# Altium PCB PCB1.PcbDoc
Units mm, origin at the board's own origin, x right, y up, seen from the top; angles counter-clockwise.
Board outline 30 x 15 mm, 2 copper layers (Top Layer, Bottom Layer); 19 components, 17 nets, 63 pads, 8 vias.
Unrouted connection lines stored in the file: 4.
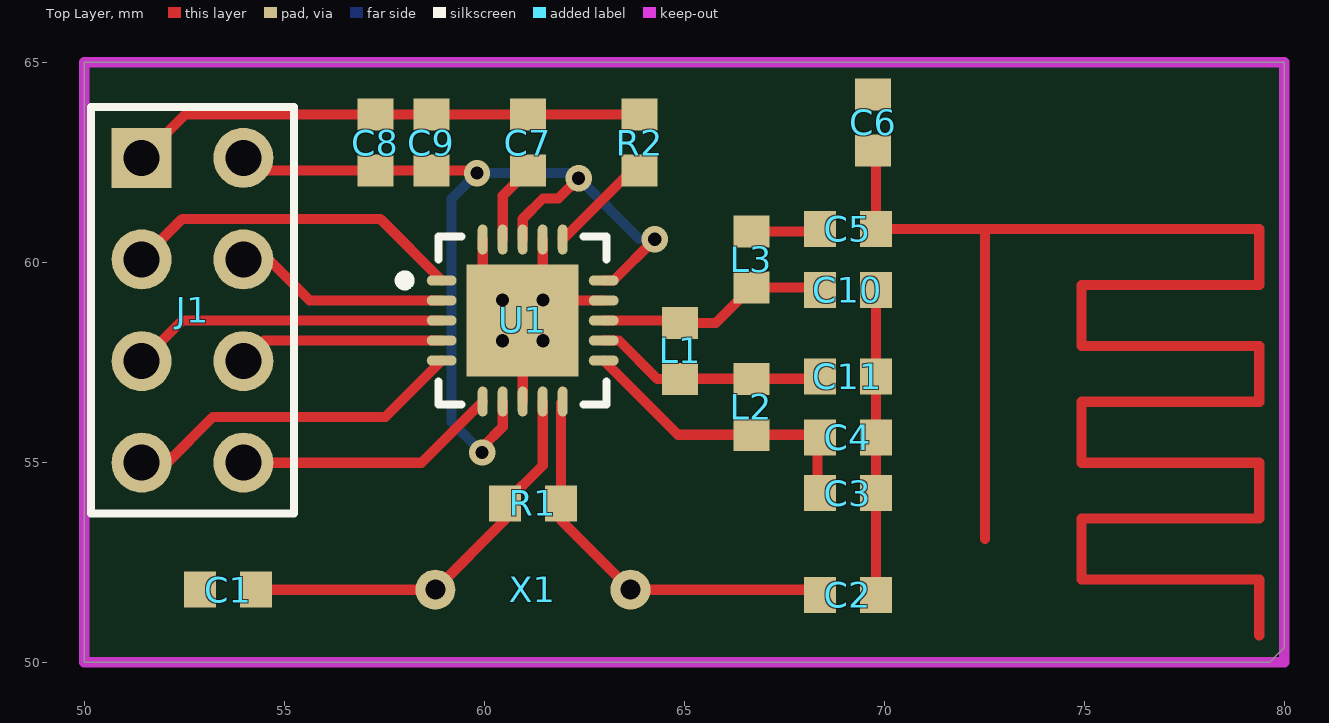
[diagram p0: Top Layer view]
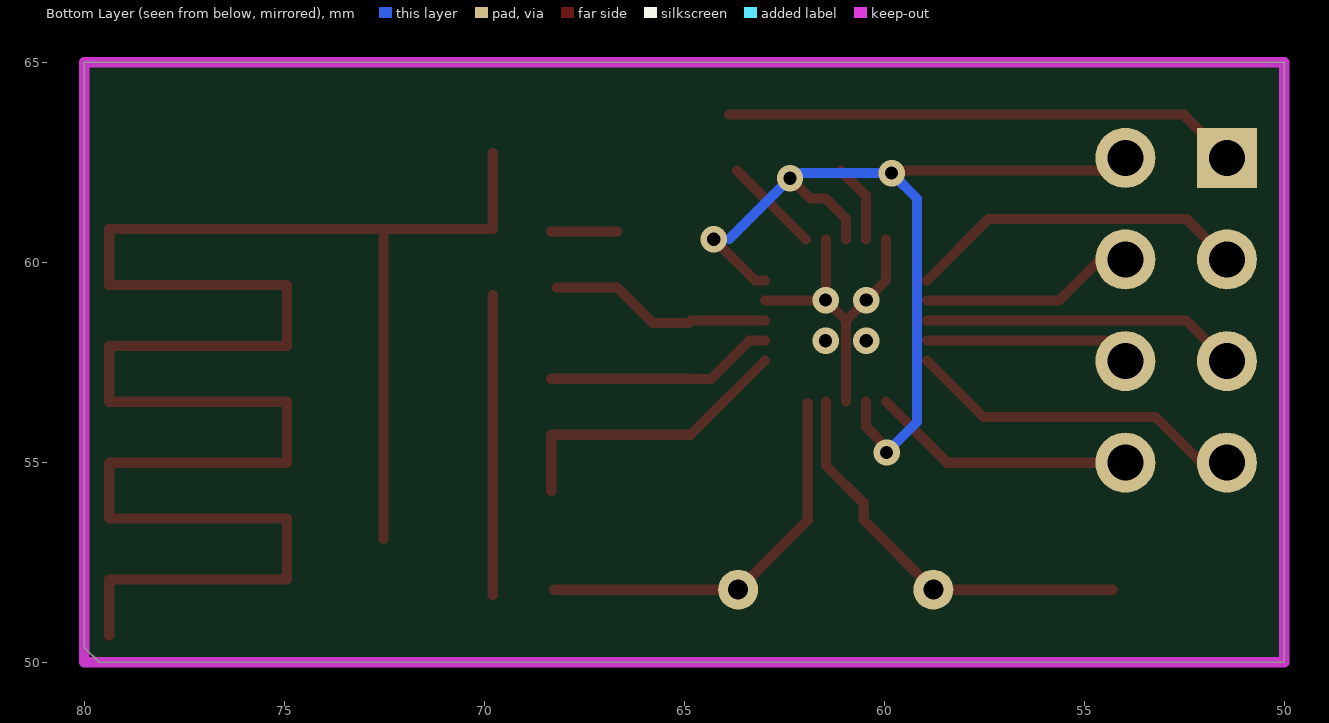
[diagram p1: Bottom Layer view, seen from below]

## Layer stack, top to bottom
Top Layer: signal copper 0.0356
Dielectric: dielectric 0.32, FR-4, Dk 4.8
Bottom Layer: signal copper 0.0356

## Board outline
50,65 80,65 80,50.371 79.629,50 50,50

## Design rules (kind name [scope] priority, off if disabled: settings)
Clearance [All] p1: gap=0
PolygonConnect [All] p1: connectstyle=Relief reliefconductorwidth=0.254 reliefentries=4 polygonreliefangle="90 Angle"
RoutingVias [All] p1: holewidth=0.711 width=1.27 viastyle="Through Hole" minholewidth=0.711 minwidth=1.27 maxholewidth=0.711 maxwidth=1.27
SilkscreenOverComponentPads [All] p1: minsilkscreentomaskgap=0.254
SolderMaskExpansion [All] p1: expansion=0.102
Width [All] p1: maxlimit=0.254 minlimit=0.254 preferedwidth=0.254
27 further rules are at their usual default settings.

## Classes and differential pairs
component class Sheet1: C1 C2 C3 C4 C5 C6 C7 C8 C9 J1 J2 L1 L2 L3 R1 R2 U1 X1

## Components (designator, comment, footprint, x,y, rotation, side; value= is the part's Value field where it differs from the comment)
C1 "22pF" 1608[0603] 53.594,51.816 r180 top
C2 "22pF" 1608[0603] 69.088,51.689 r0 top
C3 "2.2nF" 1608[0603] 69.088,54.229 r0 top
C4 "4.7pF" 1608[0603] 69.088,55.626 r0 top
C5 "15pF" 1608[0603] 69.088,60.833 r0 top
C6 "1.5pF" 1608[0603] 69.723,63.5 r90 top
C7 "33nF" 1608[0603] 61.087,62.992 r270 top
C8 "1nF" 1608[0603] 57.277,62.992 r90 top
C9 "10nF" 1608[0603] 58.674,62.992 r90 top
C10 "15pF" 1608[0603] 69.088,59.309 r0 top (schematic designator C5)
C11 "15pF" 1608[0603] 69.088,57.15 r0 top (schematic designator C5)
J1 "CON8" HDR2X4 51.435,62.611 r270 top
L1 "12nH" 1608[0603] 64.897,57.785 r270 top
L2 "2.3nH" 1608[0603] 66.675,56.388 r270 top
L3 "7.9nH" 1608[0603] 66.675,60.071 r90 top
R1 "1M" 1608[0603] 61.214,53.975 r0 top
R2 "22K" 1608[0603] 63.881,62.992 r90 top
U1 "NRF24L01" wifi 60.96,58.547 r0 top
X1 "16M" jingzhen 61.214,51.816 r180 top

## Footprints (in the part's own frame and the unit in brackets; to place one, negate y for a bottom-side part, rotate by r counter-clockwise, add the part's x,y. Pads: shape width x height; smd on the part's side, far side on the other; paste and mask are expansions set on the pad)
1608[0603] [mm] "Chip Capacitor, Body 1.6x0.8mm, IPC High Density"
  rect 0.8x0.9 smd: 1(-0.7,0) 2(0.7,0)
  body extent -0.87,-0.48 0.87,0.48, height 1.3
HDR2X4 [mm] "Connector; Header; 4x2 Position"
  rect 1.5x1.5 hole 0.9: 1(0,0)
  round 1.5 hole 0.9: 2(0,2.54) 3(2.54,0) 4(2.54,2.54) 5(5.08,0) 6(5.08,2.54) 7(7.62,0) 8(7.62,2.54)
  silkscreen extent -1.27,-1.27 8.89,3.81
jingzhen [mm]
  round 1 hole 0.5: 0(-2.44,0) 1(2.44,0)
wifi [mm]
  oval 0.75x0.25 smd: 1(-2.025,1) 2(-2.025,0.5) 3(-2.025,0) 4(-2.025,-0.5) 5(-2.025,-1) 11(2.025,-1) 12(2.025,-0.5) 13(2.025,0) 14(2.025,0.5) 15(2.025,1)
  oval 0.25x0.75 smd: 6(-1,-2.025) 7(-0.5,-2.025) 8(0,-2.025) 9(0.5,-2.025) 10(1,-2.025) 16(1,2.025) 17(0.5,2.025) 18(0,2.025) 19(-0.5,2.025) 20(-1,2.025)
  rect 2.8x2.8 smd: 21(0,0)
  silkscreen extent -3.07,-2.1 2.1,2.1, body extent -2.07,-2.07 2.07,2.07, height 0.95

## Part data
C1 C2 C3 C4 C5 C6 C7 C8 C9 C10 C11: library part CAP, "Capacitor"
J1: "Connector"
L1 L2 L3: library part INDUCTOR
R1 R2: library part RES2
U1: library part NRF2
X1: library part CRYSTAL, "Cry"

## Via types
v1: diameter 0.66, hole 0.33, Top Layer to Bottom Layer, 8 vias

## Nets (pads, with @x,y where several pads share a name; then routed paths per layer and width w, separated by ;. In a path a pad name is that pad's centre, name@x,y a point inside that pad or via, vN(x,y) a via of type N, cw(c..) or ccw(c..) an arc to the next point about the centre after c; other vN are vias at no path point)
50OHM,RFI/O: C5.2 C6.1 | length 56.1
  Top Layer w0.254: C6.1@69.788,62.735 C5.2 72.517,60.833 ; 72.517,53.086 72.517,60.833 ; 79.375,50.673 79.375,52.07 74.93,52.07 74.93,53.594 79.375,53.594 79.375,54.991 74.93,54.991 74.93,56.515 79.375,56.515 79.375,57.912 74.93,57.912 74.93,59.436 79.375,59.436 79.375,60.833 72.517,60.833
CE: J1.3 U1.1 | length 8.6
  Top Layer w0.254: J1.3 52.451,61.087 57.395,61.087 U1.1
CSN: J1.4 U1.2 | length 5.4
  Top Layer w0.254: J1.4 54.61,60.071 55.634,59.047 U1.2
GND: C1.2 C2.2 C3.2 C4.2 C6.2 C7.1 C8.2 C9.2 C10.2 C11.2 J1.1 R2.2 U1.8 U1.14 U1.17 U1.20 U1.21 | length 28.6
  Top Layer w0.254: J1.1 52.516,63.692 C8.2 C9.2 R2.2 ; U1.20 59.96,59.547 U1.21 ; U1.8 U1.21 ; U1.17 U1.21@61.46,59.047 ; U1.14 U1.21@61.46,59.047 ; C2.2 C3.2 C4.2 C11.2 C10.2@69.788,59.182 ; U1.21 U1.21@61.46,59.047
  other v1: 60.452,58.039 61.468,58.039 60.452,59.055 61.468,59.055
IRQ: J1.8 U1.6 | length 6.6
  Top Layer w0.254: J1.8 58.429,54.991 U1.6
MISO: J1.7 U1.5 | length 8.6
  Top Layer w0.254: J1.7 52.07,54.991 53.213,56.134 57.522,56.134 U1.5
MOSI: J1.6 U1.4 | length 5.2
  Top Layer w0.254: J1.6 54.491,58.047 U1.4
NetC1_1: C1.1 R1.1 U1.9 X1.1 | length 10.3
  Top Layer w0.254: C1.1 X1.1 60.514,53.556 R1.1 61.46,54.921 U1.9
NetC2_1: C2.1 R1.2 U1.10 X1.0 | length 10
  Top Layer w0.254: U1.10@61.914,56.476 R1.2 61.914,53.556 X1.0 C2.1@68.261,51.816
NetC3_1: C3.1 C4.1 L2.2 U1.11 | length 7.5
  Top Layer w0.254: U1.11 64.844,55.688 L2.2 68.326,55.688 C3.1@68.326,54.291
NetC5_1: C5.1 L3.2 | length 1.7
  Top Layer w0.254: L3.2 C5.1@68.326,60.771
NetC7_2: C7.2 U1.19 | length 2
  Top Layer w0.254: U1.19 60.46,61.665 C7.2
NetL1_1: C10.1 L1.1 L3.1 U1.13 | length 5.5
  Top Layer w0.254: U1.13 L1.1@64.835,58.547 ; L1.1 65.789,58.485 L3.1 C10.1@68.199,59.371
NetL1_2: C11.1 L1.2 L2.1 U1.12 | length 5.7
  Top Layer w0.254: U1.12 63.365,58.047 64.327,57.085 L1.2 ; L1.2@64.9,57.088 L2.1 C11.1@68.326,57.088
NetR2_1: R2.1 U1.16 | length 2.4
  Top Layer w0.254: U1.16 R2.1@63.68,62.292
SCK: J1.5 U1.3 | length 7.9
  Top Layer w0.254: J1.5 52.451,58.547 U1.3
VCC: C8.1 C9.1 J1.2 U1.7 U1.15 U1.18 | length 23.8
  Top Layer w0.254: J1.2 54.294,62.292 C8.1 C9.1 v1@59.755,62.292 ; v1(59.944,55.245) 59.944,55.372 60.46,55.888 U1.7 ; U1.18 60.96,61.087 61.468,61.595 61.849,61.595 v1(62.357,62.103) ; U1.15 63.23,59.547 v1(64.262,60.579)
  Bottom Layer w0.254: v1(59.944,55.245) 59.182,56.007 59.182,61.595 v1(59.817,62.23) 62.23,62.23 v1(62.357,62.103) 63.881,60.579

## Keep-outs
Keep-Out Layer:
  lines w0.254: 50,50 50,65 80,65 80,50 50,50